# EAGLE board canbus_shield-v12 (EAGLE 5.10)
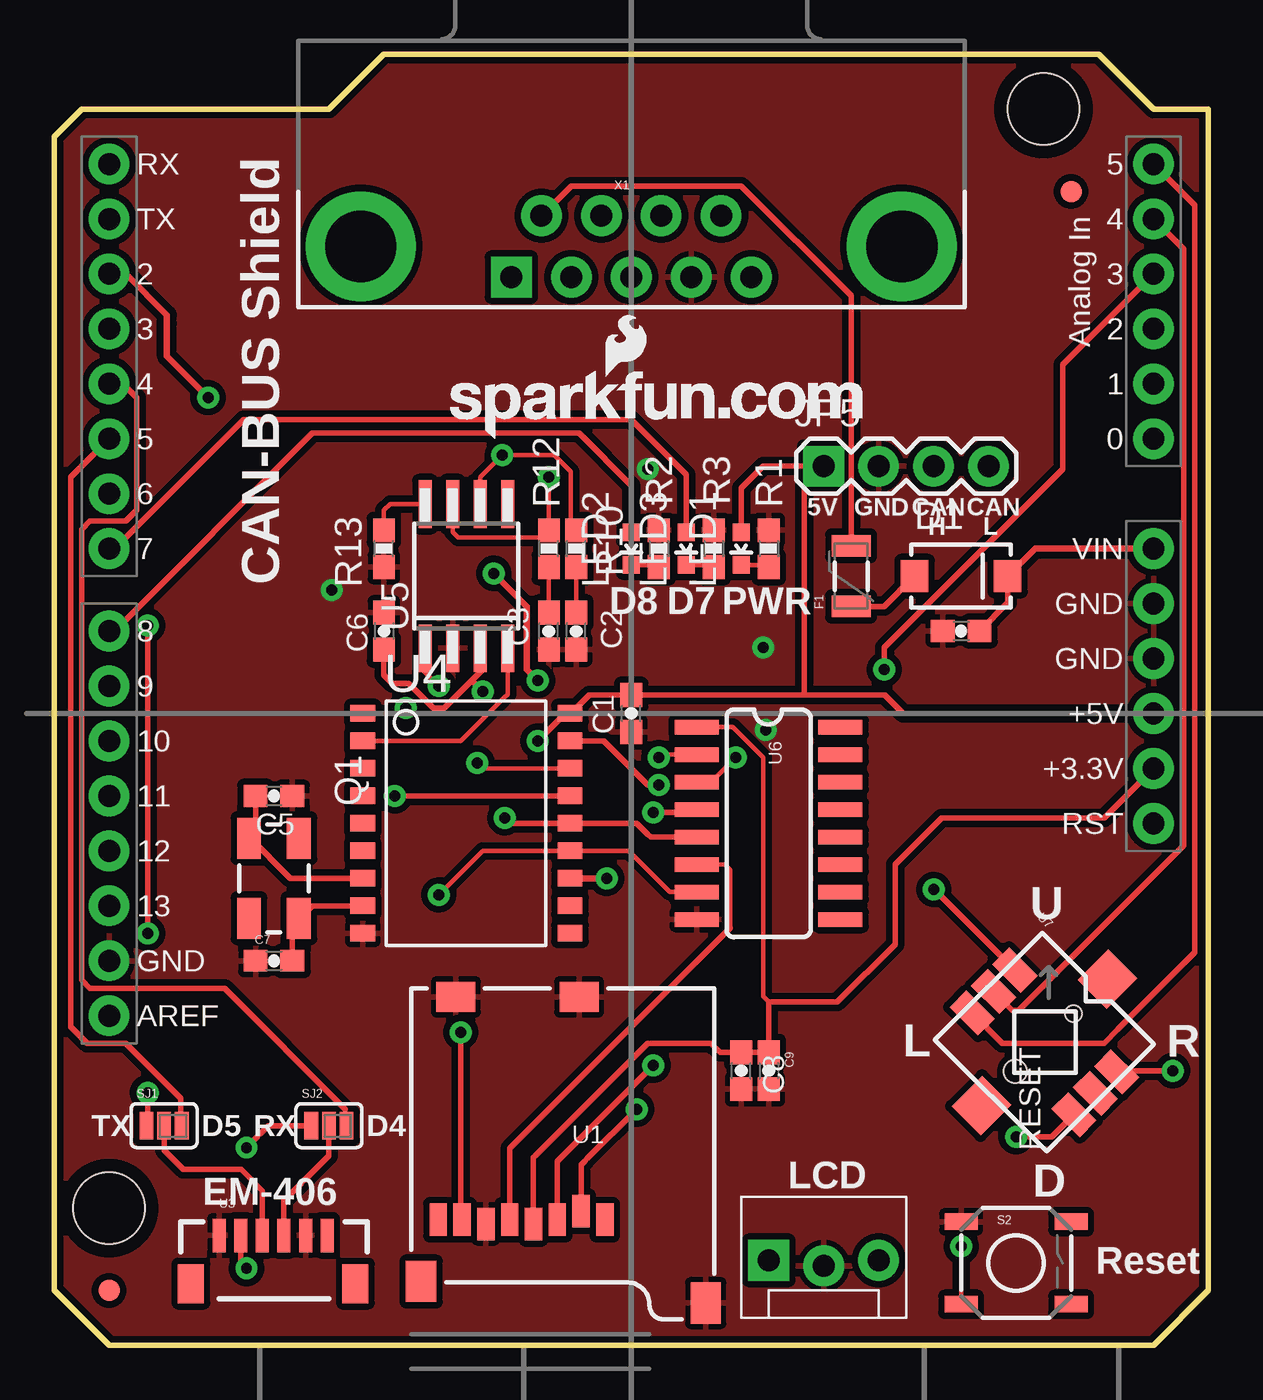
[diagram p0: board, top side]
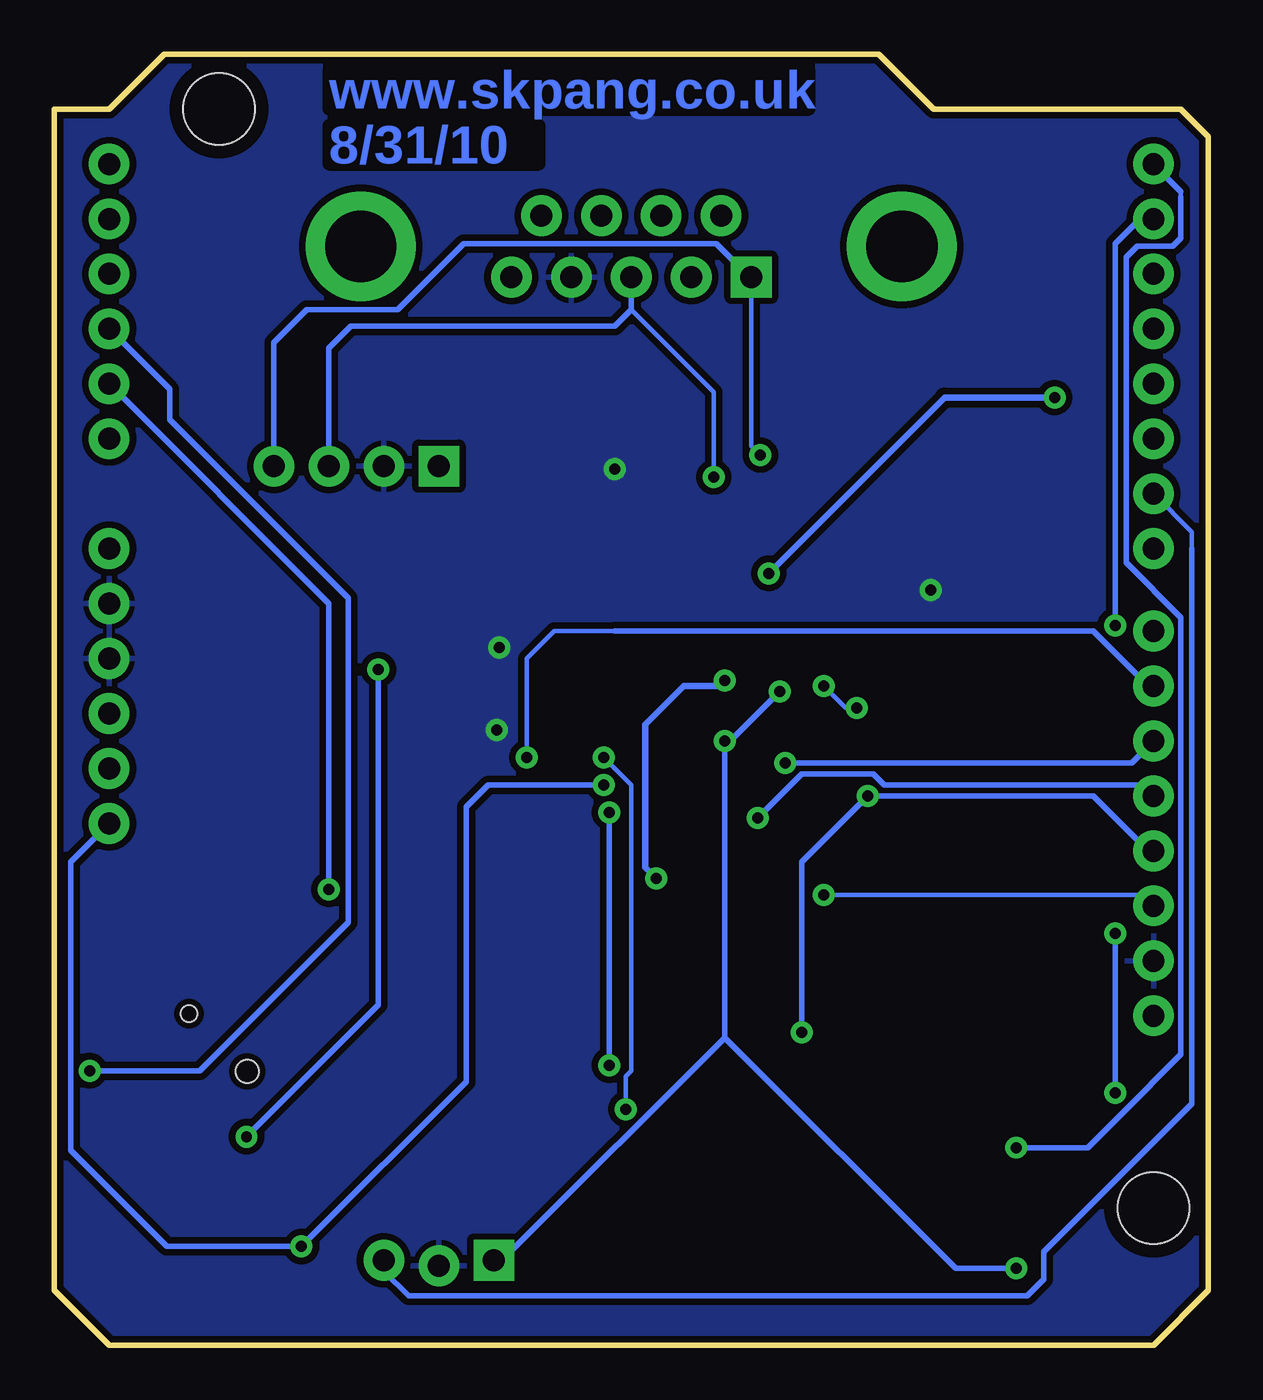
[diagram p1: board, bottom side, seen from below]

Size 53.34 x 59.69 mm. Coordinates in mm from the lower left corner, seen from the top.
Outline: 0,2.54 0,55.88 1.27,57.15 12.7,57.15 15.24,59.69 48.26,59.69 50.8,57.15 53.34,57.15 53.34,2.54 50.8,0 2.54,0 0,2.54
Copper layers (1*16): Top 0.035mm / dielectric 1.5mm / Bottom 0.035mm
Design rules "SparkFun": minimum track width 8mil, minimum drill 20mil, track to track 8mil, track to pad 8mil, pad to pad 8mil, via to via 8mil, smd to smd 8mil, copper to edge 8mil, drill to drill 8mil, minimum pad ring 12mil, minimum via ring 10mil, stop-mask expansion 4mil, vias tented up to drill 20mil, thermal gap 10mil

## Footprints (pad centres in the part's own frame; a part is rotated, then mirrored left to right if it is on the bottom)
0603-CAP = smd 1.1 x 1: 1 -0.85,0; 2 0.85,0
SMA-DIODE = smd 1.27 x 1.47: A -2.15,0; C 2.15,0
PTC-1206 = smd 1 x 1.8: 1 -1.4,0; 2 1.4,0
MOLEX-1X3_LOCK = drill 1.016 pad 1.88 square: 1 0,0.127 | drill 1.016 pad 1.88 round: 2 2.54,-0.127; 3 5.08,0.127
FIDUCIAL-1X2 = smd 1 x 1: 1 0,0
1X04 = drill 1.016 pad 1.88 square: 1 0,0 | drill 1.016 pad 1.88 round: 2 2.54,0; 3 5.08,0; 4 7.62,0
LED-0603 = smd 0.8 x 0.8: A 0,-0.75; C 0,0.75
CRYSTAL-SMD-5X3 = smd 1.9 x 1.1: 1 -1.85,-1.15; 2 1.85,-1.15; 3 1.85,1.15; 4 -1.85,1.15
0603-RES = smd 1.1 x 1: 1 -0.85,0; 2 0.85,0
TACTILE_SWITCH_SMD = smd 1.524 x 0.762: 1 -2.54,1.905; 2 2.54,1.905; 3 -2.54,-1.905; 4 2.54,-1.905
SJ_3_PASTE2&3 = smd 0.635 x 1.27: 1 -0.813,0; 2 0,0; 3 0.813,0
MICRO-SD-SOCKET-PP = smd 0.8 x 1.5: 1 -8.94,10.7; 2 -7.84,10.3; 3 -6.74,10.7; 4 -5.64,10.9; 5 -4.54,10.7; 6 -3.44,10.9; 7 -2.34,10.7; 8 -1.24,10.7 | smd 1.8 x 1.4: CD1 -2.05,0.4; CD2 -7.75,0.4 | smd 1.4 x 1.9: GND1 -13.6,14.55; GND3 -0.45,13.55
DUEMILANOVE_SHIELD = drill 1.016 pad 1.88 round: 3.3V 50.8,26.67; 5V 50.8,29.21; A0 50.8,41.91; A1 50.8,44.45; A2 50.8,46.99; A3 50.8,49.53; A4 50.8,52.07; A5 50.8,54.61; AREF 2.54,15.24; D2 2.54,49.53; D3 2.54,46.99; D4 2.54,44.45; D5 2.54,41.91; D6 2.54,39.37; D7 2.54,36.83; D8 2.54,33.02; D9 2.54,30.48; D10 2.54,27.94; D11 2.54,25.4; D12 2.54,22.86; D13 2.54,20.32; GND@0 50.8,31.75; GND@1 50.8,34.29; GND@2 2.54,17.78; RES 50.8,24.13; RX 2.54,54.61; TX 2.54,52.07; VIN 50.8,36.83 | hole 3.302: 45.72,57.15; 2.54,6.35
EM406 = smd 0.6 x 1.55: 1 0,0; 2 1,0; 3 2,0; 4 3,0; 5 4,0; 6 5,0 | smd 1.2 x 1.8: P$1 -1.3,-2.225; P$2 6.3,-2.225
SO-18W = smd 0.762 x 1.143: 1 -5.08,-4.788; 2 -3.81,-4.788; 3 -2.54,-4.788; 4 -1.27,-4.788; 5 0,-4.788; 6 1.27,-4.788; 7 2.54,-4.788; 8 3.81,-4.788; 9 5.08,-4.788; 10 5.08,4.788; 11 3.81,4.788; 12 2.54,4.788; 13 1.27,4.788; 14 0,4.788; 15 -1.27,4.788; 16 -2.54,4.788; 17 -3.81,4.788; 18 -5.08,4.788
SO-08M = smd 0.6 x 2.2: 1 -1.905,-3.33; 2 -0.635,-3.33; 3 0.635,-3.33; 4 1.905,-3.33; 5 1.905,3.33; 6 0.635,3.33; 7 -0.635,3.33; 8 -1.905,3.33
SO016 = smd 0.66 x 2.032: 1 -4.445,-3.315; 2 -3.175,-3.315; 3 -1.905,-3.315; 4 -0.635,-3.315; 5 0.635,-3.315; 6 1.905,-3.315; 7 3.175,-3.315; 8 4.445,-3.315; 9 4.445,3.315; 10 3.175,3.315; 11 1.905,3.315; 12 0.635,3.315; 13 -0.635,3.315; 14 -1.905,3.315; 15 -3.175,3.315; 16 -4.445,3.315
JOYSTICK_MINI = smd 1.85 x 1.1: A 0,2.8; B 6.65,2.8; C 0,0; CTR 0,1.4; D 6.65,0; GND 6.65,1.4 | smd 1.9 x 2: NC 3.325,5.53; NC@0 3.33,-2.72 | hole 0.75: 3.34,3.295 | hole 1.05: 3.325,-0.5
DB9_MALE = drill 1.016 pad 1.88 round: 1 5.54,-1.42; 2 2.77,-1.42; 3 0,-1.42; 4 -2.77,-1.42; 6 4.15,1.42; 7 1.38,1.42; 8 -1.38,1.42; 9 -4.15,1.42 | drill 1.016 pad 1.88 square: 5 -5.54,-1.42 | drill 3.302 pad 5.08 round: G1 -12.5,0; G2 12.5,0

## Placement (x,y rotation side)
C1  0.1uF  [0603-CAP]  26.67,29.21 90 top
C2  560pF  [0603-CAP]  24.13,33.02 90 top
C3  560pF  [0603-CAP]  22.86,33.02 90 top
C4  4.7uF 50v  [0603-CAP]  41.91,33.02 180 top
C5  22pF  [0603-CAP]  10.16,25.4 180 top
C6  0.1uF  [0603-CAP]  15.24,33.02 270 top
C7  22pF  [0603-CAP]  10.16,17.78 0 top
C8  0.1uF  [0603-CAP]  31.75,12.7 90 top
C9  1uF  [0603-CAP]  33.02,12.7 270 top
D1  MBRA140  [SMA-DIODE]  41.91,35.56 0 top
F1  PTCSMD  [PTC-1206]  36.83,35.56 90 top
JP1  DNP  [MOLEX-1X3_LOCK]  33.02,3.81 0 top
JP2  FIDUCIAL1X2  [FIDUCIAL-1X2]  2.54,2.54 0 top
JP3  FIDUCIAL1X2  [FIDUCIAL-1X2]  46.99,53.34 0 top
JP4  LOGO-SFENEW  [SFE-NEW-WEBLOGO]  18.29,41.91 0 top
JP5  DNP  [1X04]  35.56,40.64 0 top
LED1  RED  [LED-0603]  31.75,36.83 180 top
LED2  GREEN  [LED-0603]  26.67,36.83 180 top
LED3  GREEN  [LED-0603]  29.21,36.83 180 top
Q1  16MHz  [CRYSTAL-SMD-5X3]  10.16,21.59 270 top
R1  1k  [0603-RES]  33.02,36.83 270 top
R2  1k  [0603-RES]  27.94,36.83 270 top
R3  1k  [0603-RES]  30.48,36.83 270 top
R10  100  [0603-RES]  24.13,36.83 90 top
R12  100  [0603-RES]  22.86,36.83 90 top
R13  4.7k  [0603-RES]  15.24,36.83 90 top
S2  RESET  [TACTILE_SWITCH_SMD]  44.45,3.81 0 top
SJ1  [SJ_3_PASTE2&3]  5.08,10.16 0 top
SJ2  [SJ_3_PASTE2&3]  12.7,10.16 0 top
U1  USD-SOCKETNEW  [MICRO-SD-SOCKET-PP]  16.51,16.51 180 top
U2  ARDUINO_SHIELDLABEL  [DUEMILANOVE_SHIELD]  0,0 0 top
U3  EM406  [EM406]  7.62,5.08 0 top
U4  MCP2515  [SO-18W]  19.05,24.13 270 top
U5  MCP2551  [SO-08M]  19.05,35.56 0 top
U6  HEX_CONVERTER  [SO016]  33.02,24.13 270 top
U7  JOYSTICK_MINI4UCON  [JOYSTICK_MINI]  42.42,15.37 315 top
U$1  CREATIVE_COMMONS  [CREATIVE_COMMONS]  20.32,-11.43 0 top  (outside the outline)
X1  DB9 Plug  [DB9_MALE]  26.67,50.8 0 top

## Library data of the parts
C1-C9 D1 F1 JP1-JP5 LED1-LED3 Q1 R1-R3 R10 R12 R13 S2 SJ1 SJ2 U1-U3 U6 U7 U$1 X1 = SparkFun
U4 = microchip_can
U5 = skpang_lib

## Nets
3.3V: C8.2 C9.1 U1.4 U2.3.3V U6.1
+12V: C4.1 D1.C U2.VIN
CAN_CS: U2.D10 U4.16
CAN_INT: U2.D2 U4.12
CAN_RXD: U4.2 U5.4
CAN_TXD: U4.1 U5.1
CANH: JP5.3 R12.2 U5.7 X1.3
CANL: JP5.4 R10.2 U5.6 X1.5
D4: SJ2.3 U2.D4
D5: SJ1.3 U2.D5
GND: C1.1 C2.1 C3.1 C4.2 C5.1 C6.1 C7.1 C8.1 C9.2 JP1.2 JP5.2 R1.1 R2.1 R3.1 R13.1 S2.1 U1.6 U1.CD1 U1.CD2 U1.GND1 U2.GND@0 U2.GND@1 U2.GND@2 U3.1 U3.5 U4.9 U5.2 U6.8 U7.GND X1.2
JOY-CLICK: U2.A4 U7.CTR
JOY-DOWN: U2.A3 U7.D
JOY-LEFT: U2.A2 U7.B
JOY-RIGHT: U2.A5 U7.C
JOY-UP: U2.A1 U7.A
LCD: JP1.3 U2.D6
MISO: U1.7 U2.D12 U4.15
MOSI: U2.D11 U4.14 U6.5
N$4: LED1.C R1.2
N$5: LED2.C R2.2
N$6: LED3.C R3.2
N$9: C2.2 R10.1
N$10: C3.2 R12.1
N$11: LED2.A U2.D8
N$12: LED3.A U2.D7
N$13: F1.2 X1.9
N$14: R13.2 U5.8
N$15: U1.2 U6.2
N$16: D1.A F1.1
N$17: C7.2 Q1.3 U4.8
N$18: C5.2 Q1.1 U4.7
N$19: U1.3 U6.4
N$21: SJ1.2 U3.3
N$22: SJ2.2 U3.4
N$24: U1.5 U6.6
RS: S2.3 U2.RES U4.17
RX: SJ2.1 U2.RX
SCK: U2.D13 U4.13 U6.7
SD_CS: U2.D9 U6.3
TX: SJ1.1 U2.TX
VCC: C1.2 C6.2 JP1.1 JP5.1 LED1.A U2.5V U3.2 U4.18 U5.3

## Tracks (layer width: path | path; a pad name or v marks a point on that pad's centre or on a via)
3.3V
  Top 0.203: U6.1 31.37,28.57 31.5,28.45 32.77,27.18 32.77,16.13 33.02,15.88 | 27.43,13.97 27.56,13.97 | C9.1 33.02,13.46 32.93,13.55
  Top 0.254: 27.43,13.97 22.35,8.89 22.23,8.76 22.15,8.69 U1.4 | 27.56,13.97 30.35,13.97 30.77,13.55 C8.2 32.93,13.55 | C9.1 33.02,15.88 36.2,15.88 38.86,18.54 38.86,22.23 41.02,24.38 48.51,24.38 U2.3.3V
+12V
  Top 0.254: D1.C 44.07,35.43 44.07,34.33 C4.1
  Top 0.305: U2.VIN 50.04,36.83 46.48,36.83 46.35,36.83 46.1,36.83 45.33,36.83 D1.C
CAN_CS  (via drill 0.51)
  Top 0.203: v19.56,26.92 19.68,26.92 19.94,26.67 U4.16
  Bottom 0.203: 3.68,26.92 3.81,26.92
  Bottom 0.254: 3.81,26.92 v19.56,26.92 | U2.D10 3.56,26.92 3.68,26.92
CAN_INT  (via drill 0.51)
  Top 0.305: U4.12 v25.53,21.59 | v22.35,30.73 21.84,31.24 21.84,31.75 21.84,34.16 v20.32,35.69 | v7.11,43.81 5.21,45.72 5.21,47.24 5.21,47.62 3.3,49.53 U2.D2
  Bottom 0.305: v22.35,30.73 22.61,30.48 24.26,30.48 26.04,28.7 26.04,26.04 26.04,22.1 v25.53,21.59 | v20.32,35.69 12.19,43.81 v7.11,43.81
CAN_RXD
  Top 0.203: U4.2 18.8,27.94 18.92,28.07 19.05,28.19 20.83,29.97 20.95,30.1 U5.4
CAN_TXD  (via drill 0.51)
  Top 0.203: v17.78,30.48 17.02,31.24 U5.1 | U4.1 16,29.21 v16.26,29.46
  Bottom 0.203: v16.26,29.46 16.76,29.46 v17.78,30.48
CANH  (via drill 0.51)
  Top 0.203: v22.86,40.13 22.86,38.1 R12.2 22.61,37.34 19.05,37.34 18.67,37.34 18.41,37.59 U5.7
  Bottom 0.203: v22.86,40.13 22.86,44.07 26.67,47.88
  Bottom 0.254: X1.3 26.67,47.88 27.43,47.12 39.62,47.12 40.64,46.1 JP5.3
CANL  (via drill 0.51)
  Top 0.203: R10.2 23.88,38.1 23.88,40.39 23.11,41.15 21.08,41.15 v20.7,41.15 19.68,40.13 U5.6
  Bottom 0.203: X1.5 21.13,41.58 v20.7,41.15
  Bottom 0.254: 21.08,49.28 21.13,49.32 X1.5 21.19,49.38 21.21,49.4 22.73,50.93 34.42,50.93 37.47,47.88 41.66,47.88 43.18,46.35 JP5.4
D4
  Top 0.203: 13.46,10.92 13.46,10.67 SJ2.3 | 3.81,42.93 3.81,43.05
  Top 0.254: 13.46,10.92 7.87,16.51 2.03,16.51 1.65,16.51 1.27,16.89 1.27,17.27 1.27,37.34 1.27,37.72 1.65,38.1 2.03,38.1 3.05,38.1 3.3,38.1 3.81,38.61 3.81,38.86 3.81,42.93 | U2.D4 3.17,44.45 3.81,43.81 3.81,43.05
D5
  Top 0.203: 5.84,10.67 SJ1.3
  Top 0.254: 5.84,10.67 5.84,11.43 3.3,13.97 2.03,13.97 1.52,13.97 0.76,14.73 0.76,15.24 0.76,39.88 0.76,40.01 0.76,40.13 U2.D5
GND  (via drill 0.51)
  other vias: 32.89,28.45 27.43,40.51 32.77,32.26 12.83,34.92
  pour Bottom (isolate 0.305): 0,0 0,59.69 53.34,59.69 53.34,0
  pour Top (isolate 0.305): 0,0 0,59.69 53.34,59.69 53.34,0
JOY-CLICK
  Top 0.254: U2.A4 52.2,50.67 52.2,49.78 52.2,24 52.2,23.75 52.2,23.11 44.58,15.49 44.27,15.49 U7.CTR
JOY-DOWN  (via drill 0.51)
  Top 0.254: U2.A3 46.61,45.34 46.61,40.51 38.35,32.26 38.35,31.75 v38.35,31.24 | U7.D 46.11,9.65 v44.45,9.65
  Bottom 0.254: v38.35,31.24 38.35,27.05 38.35,15.75 v44.45,9.65
JOY-LEFT  (via drill 0.51)
  Top 0.254: U7.B 49.16,12.7 v51.69,12.7
  Bottom 0.254: U2.A2 48.01,44.2 48.01,42.93 48.01,42.8 39.75,34.54 39.75,19.56 46.61,12.7 v51.69,12.7
JOY-RIGHT
  Top 0.254: U2.A5 52.7,52.7 52.7,23.5 52.7,21.75 52.7,18.16 49.15,14.61 48.51,13.97 45.72,13.97 45.47,13.97 43.81,13.97 U7.C
JOY-UP  (via drill 0.51)
  Top 0.254: U7.A 40.64,21.11 v40.64,21.08
  Bottom 0.254: v40.64,21.08 40.64,27.94 40.64,34.04 40.64,34.29 U2.A1
LCD
  Bottom 0.203: 0.76,36.83 0.76,36.96 0.76,37.59 U2.D6
  Bottom 0.254: 0.76,36.83 0.76,11.18 7.62,4.32 7.62,3.05 8.38,2.29 36.07,2.29 36.32,2.29 36.96,2.29 38.1,3.43 JP1.3
MISO  (via drill 0.51)
  Top 0.203: 23.37,25.4 U4.15 | U1.7 18.8,6.35
  Top 0.254: v15.75,25.4 23.37,25.4 | 18.8,6.35 v18.8,14.48
  Bottom 0.203: 3.3,23.37 U2.D12
  Bottom 0.254: 3.3,23.37 5.33,25.4 v15.75,25.4 16,25.15 18.8,22.35 v18.8,14.48
MOSI  (via drill 0.51)
  Top 0.254: v20.83,24.38 21.08,24.13 U4.14 26.92,24.13 27.18,23.88 27.43,23.62 27.56,23.5 U6.5
  Bottom 0.254: v20.83,24.38 18.8,26.42 15.49,26.42 14.99,25.91 3.3,25.91 U2.D11
N$4
  Top 0.203: LED1.C 32,36.07 32.77,36.07 R1.2
N$5
  Top 0.203: LED2.C 26.92,36.07 27.69,36.07 R2.2
N$6
  Top 0.203: LED3.C 29.46,36.07 30.23,36.07 R3.2
N$9
  Top 0.203: C2.2 24.13,34.29 24.13,35.56 R10.1
N$10
  Top 0.203: C3.2 22.86,34.29 22.86,35.56 R12.1
N$11
  Top 0.203: LED2.A 26.42,37.34
  Top 0.254: U2.D8 2.79,33.02 3.17,33.4 3.3,33.53 11.43,41.66 11.94,42.16 20.07,42.16 24.26,42.16 26.67,39.75 26.67,39.62 LED2.A
N$12
  Top 0.203: LED3.A 28.96,37.34
  Top 0.254: U2.D7 3.3,37.34 8.76,42.8 13.46,42.8 13.59,42.8 26.67,42.8 29.21,40.26 LED3.A
N$13
  Top 0.254: X1.9 23.89,53.59 24.64,53.59 31.24,53.59 31.75,53.59 36.83,48.51 36.83,48.01 36.83,47.12 F1.2
N$14
  Top 0.203: U5.8 15.52,38.89 15.24,38.61 15.24,38.48 R13.2
N$15  (via drill 0.51)
  Top 0.203: U6.2 28.07,27.3 v27.94,27.18
  Top 0.254: v26.92,10.92 24.64,8.64 24.51,8.51 24.35,8.35 U1.2
  Bottom 0.203: v26.92,10.92 26.92,12.45 26.67,12.7 26.67,25.91 v27.94,27.18
N$16
  Top 0.254: D1.A 38.35,34.16 F1.1
N$17
  Top 0.254: U4.8 11.94,20.32 11.3,19.68 11.31,19.69 Q1.3 11.31,19.8 11.3,19.81 11.01,19.52 C7.2
N$18
  Top 0.254: U4.7 10.92,21.59 9.02,23.5 9.01,23.49 Q1.1 9.01,23.38 9.02,23.37 9.31,23.66 C5.2
N$19  (via drill 0.51)
  Top 0.203: 28.7,24.64 U6.4
  Top 0.254: v27.69,12.95 23.62,8.89 23.5,8.76 23.25,8.52 U1.3 | v27.69,24.64 28.7,24.64
  Bottom 0.254: v27.69,12.95 v27.69,24.64
N$21
  Top 0.254: SJ1.2 5.08,9.02 5.97,8.13 6.22,8.13 8.64,8.13 9.62,7.14 U3.3
N$22
  Top 0.203: 11.43,7.49 11.56,7.62
  Top 0.254: U3.4 10.62,6.68 11.43,7.49 | SJ2.2 12.7,8.76 11.56,7.62
N$24
  Top 0.203: 31.24,19.3 31.24,21.34 31.24,21.59 31.24,21.97 30.99,22.23 U6.6
  Top 0.254: 31.24,19.3 21.34,9.4 21.21,9.27 21.05,9.11 U1.5
RS  (via drill 0.51)
  Top 0.203: v41.91,4.57 41.91,2.03 S2.3
  Top 0.254: v27.94,25.91 27.43,25.91 25.65,27.69 25.4,27.94 U4.17
  Bottom 0.254: v27.94,25.91 33.27,25.91 34.29,24.89 34.29,12.19 v41.91,4.57 42.04,4.57 48.13,4.57 52.58,9.02 52.58,12.19 52.58,22.35 U2.RES
RX  (via drill 0.51)
  Top 0.203: 9.4,9.65 9.53,9.78
  Top 0.254: v8.89,9.14 9.4,9.65 | SJ2.1 9.91,10.16 9.53,9.78
  Bottom 0.203: 1.27,53.09 1.27,53.21 1.27,53.34
  Bottom 0.254: v8.89,9.14 6.6,9.14 6.48,9.14 5.59,9.14 4.06,10.67 1.27,13.46 1.27,33.53 1.27,33.66 3.81,36.2 3.81,36.32 3.81,50.04 3.81,50.29 3.3,50.8 3.05,50.8 2.03,50.8 1.65,50.8 1.27,51.18 1.27,51.56 1.27,53.09 | 1.27,53.34 U2.RX
SCK  (via drill 0.51)
  Top 0.203: U6.7 28.45,20.95 26.54,22.86 26.29,22.86 24.38,22.86 U4.13 19.81,22.86 v17.78,20.83
  Bottom 0.203: v17.78,20.83 3.3,20.83 U2.D13
SD_CS  (via drill 0.51)
  Top 0.203: v31.5,27.18 30.48,26.16 U6.3
  Bottom 0.203: v31.5,27.18 31.5,28.96 31.5,29.21 31.5,31.75 30.23,33.02 27.43,33.02 | U2.D9 3.3,30.99
  Bottom 0.254: 27.43,33.02 5.33,33.02 3.3,30.99
TX  (via drill 0.51)
  Top 0.203: SJ1.1 4.32,10.67
  Top 0.254: 4.32,10.67 v4.32,11.68 | v4.32,19.05 v4.32,33.27
  Bottom 0.254: v4.32,11.68 v4.32,19.05 | v4.32,33.27 4.32,50.55 4.32,50.93 3.17,52.07 U2.TX
VCC  (via drill 0.51)
  Top 0.203: 23.37,28.96 U4.18
  Top 0.254: 19.3,30.73 19.81,31.24 U5.3 | 19.3,30.73 18.03,29.46 17.53,29.46 16.76,30.23 16.64,30.35 16.38,30.61 15.62,30.61 15.24,30.99 C6.2 | v22.35,27.94 23.37,28.96 | v19.81,30.23 19.3,30.73 | U4.18 23.88,29.21 24.73,30.06 C1.2 27.56,30.06 27.73,30.06 29.04,30.06 34.67,30.06 | U2.5V 46.74,29.21 39.24,29.21 38.48,29.97 38.39,30.06 38.27,30.06 34.67,30.06 | U3.2 8.62,3.83 v8.89,3.56 | 34.67,30.06 34.67,30.1 34.67,39.75 JP5.1 32.77,40.64 31.75,39.62 LED1.A
  Bottom 0.203: 22.1,27.94 v22.35,27.94 22.61,28.19
  Bottom 0.254: 22.35,14.22 v22.35,27.94 | 22.35,14.22 32.26,4.32 32.38,4.19 32.64,3.94 JP1.1 | v8.89,3.56 11.68,3.56 22.35,14.22 | 22.1,27.94 v19.81,30.23

## Text on the board
Bottom: www.skpang.co.uk | 8/31/10
tPlace: 5V | GND | CAN | CAN | H | L | CAN-BUS Shield | D8 | D7 | PWR | U | L | R | TX | D5 | RX | D4 | LCD | D | EM-406 | Reset
tNames: RESET
tValues: Sukking Pang and Ryan Owens